# Altium PCB PCB1.PcbDoc (part 5 of 10)
Units mm, origin at the board's own origin, x right, y up, seen from the top; angles counter-clockwise.
Board outline 171.83 x 244.04 mm, 2 copper layers (Top Layer, Bottom Layer); 100 components, 186 nets, 878 pads, 221 vias.
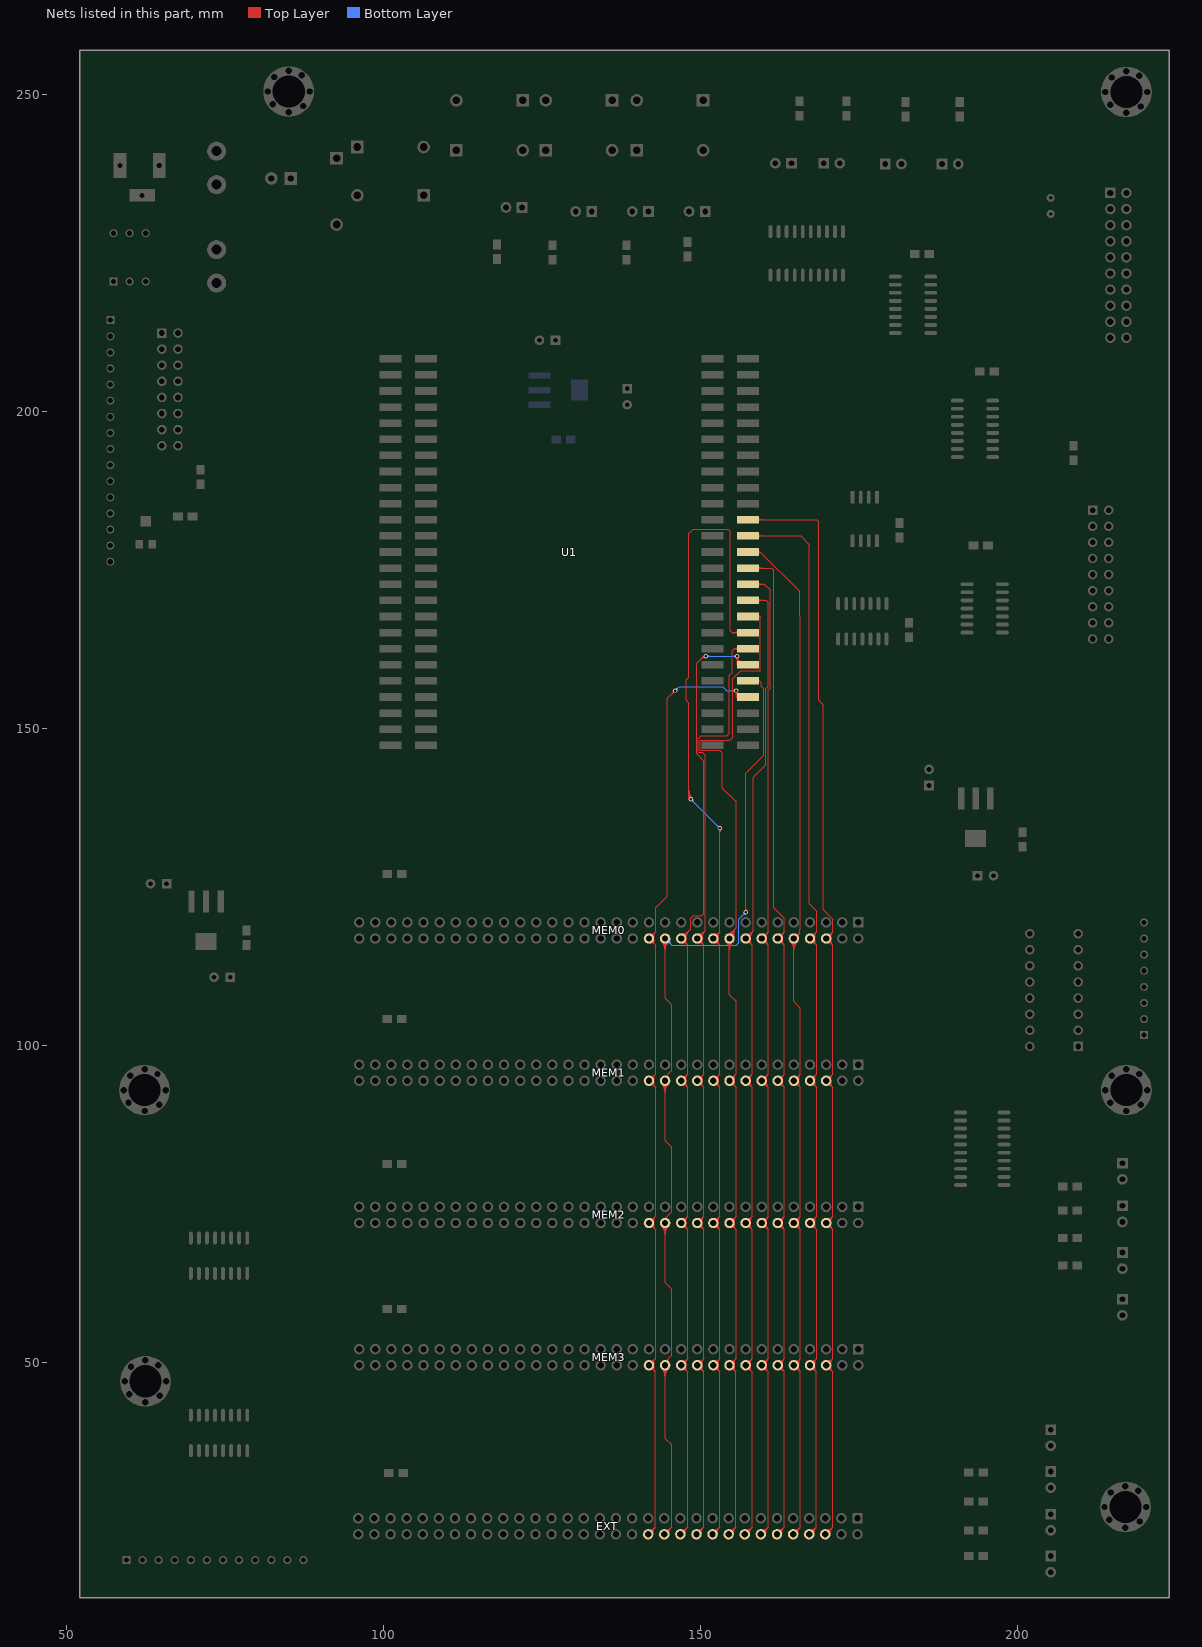
[diagram p5: the nets of this part, all layers, seen from the top]

## Via types
v1: diameter 0.7, hole 0.4, Top Layer to Bottom Layer, 221 vias

## Nets (pads, with @x,y where several pads share a name; then routed paths per layer and width w, separated by ;. In a path a pad name is that pad's centre, name@x,y a point inside that pad or via, vN(x,y) a via of type N, cw(c..) or ccw(c..) an arc to the next point about the centre after c; other vN are vias at no path point) (continued)
D02: EXT.6 MEM0.6 MEM1.6 MEM2.6 MEM3.6 U1.22 | length 223.3
  Top Layer w0.152: U1.22@157.48,182.88 168.313,182.88 168.631,182.562 168.631,154.407 169.316,153.721 169.316,121.387 170.84,119.863 170.84,117.881 ; U1.22@158.893,182.617 cw(c159.527,181.983) 159.527,182.88 cw(c159.527,183.777) U1.22@158.893,183.143 ; U1.22@159,182.51 cw(c159.895,181.615) 159.895,182.88 cw(c159.895,184.145) U1.22@159,183.25 ; EXT.6@169.672,22.86 170.815,24.003 ; EXT.6@169.708,23.302 ccw(c169.775,24.112) 170.35,23.538 ccw(c170.924,22.963) EXT.6@170.114,22.896 ; EXT.6@169.721,23.454 ccw(c169.811,24.542) 170.582,23.77 ccw(c171.354,22.999) EXT.6@170.266,22.909 ; EXT.6@169.734,23.606 ccw(c169.846,24.972) 170.815,24.003 ; MEM3.6@169.868,49.969 ccw(c169.966,50.598) 170.416,50.147 ccw(c170.867,49.697) MEM3.6@170.238,49.599 ; MEM2.6@169.868,71.528 cw(c169.966,70.899) 170.416,71.349 cw(c170.867,71.799) MEM2.6@170.238,71.898 ; MEM2.6@169.868,72.405 ccw(c169.966,73.034) 170.416,72.584 ccw(c170.867,72.134) MEM2.6@170.238,72.035 ; MEM1.6@169.868,93.965 cw(c169.966,93.336) 170.416,93.786 cw(c170.867,94.236) MEM1.6@170.238,94.335 ; MEM1.6@169.868,94.842 ccw(c169.966,95.471) 170.416,95.021 ccw(c170.867,94.571) MEM1.6@170.238,94.472 ; MEM0.6@169.868,116.401 cw(c169.966,115.772) 170.416,116.223 cw(c170.867,116.673) MEM0.6@170.238,116.771 ; MEM0.6@169.868,117.279 ccw(c169.966,117.908) 170.416,117.457 ccw(c170.867,117.007) MEM0.6@170.238,116.909 ; MEM3.6@169.877,49.093 cw(c169.98,48.507) 170.401,48.928 cw(c170.822,49.349) MEM3.6@170.236,49.452 ; MEM3.6@169.891,50.119 ccw(c170.024,50.964) 170.628,50.359 ccw(c171.233,49.755) MEM3.6@170.388,49.622 ; MEM2.6@169.891,71.377 cw(c170.024,70.533) 170.628,71.137 cw(c171.233,71.742) MEM2.6@170.388,71.874 ; MEM2.6@169.891,72.556 ccw(c170.024,73.401) 170.628,72.796 ccw(c171.233,72.191) MEM2.6@170.388,72.059 ; MEM1.6@169.891,93.814 cw(c170.024,92.969) 170.628,93.574 cw(c171.233,94.179) MEM1.6@170.388,94.311 ; MEM1.6@169.891,94.993 ccw(c170.024,95.837) 170.628,95.233 ccw(c171.233,94.628) MEM1.6@170.388,94.496 ; MEM0.6@169.891,116.251 cw(c170.024,115.406) 170.628,116.011 cw(c171.233,116.615) MEM0.6@170.388,116.748 ; MEM0.6@169.891,117.429 ccw(c170.024,118.274) 170.628,117.669 ccw(c171.233,117.065) MEM0.6@170.388,116.932 ; MEM3.6@169.903,48.943 cw(c170.043,48.155) 170.608,48.721 cw(c171.174,49.286) MEM3.6@170.386,49.426 ; MEM3.6@169.915,50.27 ccw(c170.081,51.331) 170.84,50.571 ; MEM2.6@169.915,71.227 cw(c170.081,70.166) 170.84,70.925 ; MEM2.6@169.915,72.706 ccw(c170.081,73.767) 170.84,73.008 ; MEM1.6@169.915,93.664 cw(c170.081,92.603) 170.84,93.362 ; MEM1.6@169.915,95.143 ccw(c170.081,96.204) 170.84,95.445 ; MEM0.6@169.915,116.1 cw(c170.081,115.039) 170.84,115.799 ; MEM0.6@169.915,117.58 ccw(c170.081,118.641) 170.84,117.881 ; MEM3.6@169.93,48.793 cw(c170.105,47.804) 170.815,48.514 ; EXT.6@170.418,22.922 cw(c171.784,23.034) 170.815,24.003 ; MEM3.6@170.536,49.399 ccw(c171.525,49.224) 170.815,48.514 ; MEM3.6@170.539,49.646 cw(c171.6,49.812) 170.84,50.571 ; MEM2.6@170.539,71.851 ccw(c171.6,71.685) 170.84,70.925 ; MEM2.6@170.539,72.083 cw(c171.6,72.249) 170.84,73.008 ; MEM1.6@170.539,94.287 ccw(c171.6,94.121) 170.84,93.362 ; MEM1.6@170.539,94.519 cw(c171.6,94.685) 170.84,95.445 ; MEM0.6@170.539,116.724 ccw(c171.6,116.558) 170.84,115.799 ; MEM0.6@170.539,116.956 cw(c171.6,117.122) 170.84,117.881 ; 170.815,24.003 170.815,48.514 ; 170.815,48.514 MEM3.6@169.799,49.53 170.84,50.571 ; 170.84,50.571 170.84,70.925 ; 170.84,70.925 MEM2.6@169.799,71.967 170.84,73.008 ; 170.84,73.008 170.84,93.362 ; 170.84,93.362 MEM1.6@169.799,94.403 170.84,95.445 ; 170.84,95.445 170.84,115.799 ; 170.84,115.799 MEM0.6@169.799,116.84 170.84,117.881
D03: EXT.8 MEM0.8 MEM1.8 MEM2.8 MEM3.8 U1.24 | length 218.2
  Top Layer w0.152: U1.24@157.48,180.34 165.803,180.34 167.157,178.985 167.157,122.301 168.3,121.158 168.3,117.881 ; U1.24@158.893,180.077 cw(c159.527,179.443) 159.527,180.34 cw(c159.527,181.237) U1.24@158.893,180.603 ; U1.24@159,179.97 cw(c159.895,179.075) 159.895,180.34 cw(c159.895,181.605) U1.24@159,180.71 ; EXT.8@167.132,22.86 168.275,24.003 ; EXT.8@167.168,23.302 ccw(c167.235,24.112) 167.81,23.538 ccw(c168.384,22.963) EXT.8@167.574,22.896 ; EXT.8@167.181,23.454 ccw(c167.271,24.542) 168.042,23.77 ccw(c168.814,22.999) EXT.8@167.726,22.909 ; EXT.8@167.194,23.606 ccw(c167.306,24.972) 168.275,24.003 ; MEM3.8@167.328,49.969 ccw(c167.426,50.598) 167.876,50.147 ccw(c168.327,49.697) MEM3.8@167.698,49.599 ; MEM2.8@167.328,71.528 cw(c167.426,70.899) 167.876,71.349 cw(c168.327,71.799) MEM2.8@167.698,71.898 ; MEM2.8@167.328,72.405 ccw(c167.426,73.034) 167.876,72.584 ccw(c168.327,72.134) MEM2.8@167.698,72.035 ; MEM1.8@167.328,93.965 cw(c167.426,93.336) 167.876,93.786 cw(c168.327,94.236) MEM1.8@167.698,94.335 ; MEM1.8@167.328,94.842 ccw(c167.426,95.471) 167.876,95.021 ccw(c168.327,94.571) MEM1.8@167.698,94.472 ; MEM0.8@167.328,116.401 cw(c167.426,115.772) 167.876,116.223 cw(c168.327,116.673) MEM0.8@167.698,116.771 ; MEM0.8@167.328,117.279 ccw(c167.426,117.908) 167.876,117.457 ccw(c168.327,117.007) MEM0.8@167.698,116.909 ; MEM3.8@167.337,49.093 cw(c167.44,48.507) 167.861,48.928 cw(c168.282,49.349) MEM3.8@167.696,49.452 ; MEM3.8@167.351,50.119 ccw(c167.484,50.964) 168.088,50.359 ccw(c168.693,49.755) MEM3.8@167.848,49.622 ; MEM2.8@167.351,71.377 cw(c167.484,70.533) 168.088,71.137 cw(c168.693,71.742) MEM2.8@167.848,71.874 ; MEM2.8@167.351,72.556 ccw(c167.484,73.401) 168.088,72.796 ccw(c168.693,72.191) MEM2.8@167.848,72.059 ; MEM1.8@167.351,93.814 cw(c167.484,92.969) 168.088,93.574 cw(c168.693,94.179) MEM1.8@167.848,94.311 ; MEM1.8@167.351,94.993 ccw(c167.484,95.837) 168.088,95.233 ccw(c168.693,94.628) MEM1.8@167.848,94.496 ; MEM0.8@167.351,116.251 cw(c167.484,115.406) 168.088,116.011 cw(c168.693,116.615) MEM0.8@167.848,116.748 ; MEM0.8@167.351,117.429 ccw(c167.484,118.274) 168.088,117.669 ccw(c168.693,117.065) MEM0.8@167.848,116.932 ; MEM3.8@167.363,48.943 cw(c167.503,48.155) 168.068,48.721 cw(c168.634,49.286) MEM3.8@167.846,49.426 ; MEM3.8@167.375,50.27 ccw(c167.541,51.331) 168.3,50.571 ; MEM2.8@167.375,71.227 cw(c167.541,70.166) 168.3,70.925 ; MEM2.8@167.375,72.706 ccw(c167.541,73.767) 168.3,73.008 ; MEM1.8@167.375,93.664 cw(c167.541,92.603) 168.3,93.362 ; MEM1.8@167.375,95.143 ccw(c167.541,96.204) 168.3,95.445 ; MEM0.8@167.375,116.1 cw(c167.541,115.039) 168.3,115.799 ; MEM0.8@167.375,117.58 ccw(c167.541,118.641) 168.3,117.881 ; MEM3.8@167.39,48.793 cw(c167.565,47.804) 168.275,48.514 ; EXT.8@167.878,22.922 cw(c169.244,23.034) 168.275,24.003 ; MEM3.8@167.996,49.399 ccw(c168.985,49.224) 168.275,48.514 ; MEM3.8@167.999,49.646 cw(c169.06,49.812) 168.3,50.571 ; MEM2.8@167.999,71.851 ccw(c169.06,71.685) 168.3,70.925 ; MEM2.8@167.999,72.083 cw(c169.06,72.249) 168.3,73.008 ; MEM1.8@167.999,94.287 ccw(c169.06,94.121) 168.3,93.362 ; MEM1.8@167.999,94.519 cw(c169.06,94.685) 168.3,95.445 ; MEM0.8@167.999,116.724 ccw(c169.06,116.558) 168.3,115.799 ; MEM0.8@167.999,116.956 cw(c169.06,117.122) 168.3,117.881 ; 168.275,24.003 168.275,48.514 ; 168.275,48.514 MEM3.8@167.259,49.53 168.3,50.571 ; 168.3,50.571 168.3,70.925 ; 168.3,70.925 MEM2.8@167.259,71.967 168.3,73.008 ; 168.3,73.008 168.3,93.362 ; 168.3,93.362 MEM1.8@167.259,94.403 168.3,95.445 ; 168.3,95.445 168.3,115.799 ; 168.3,115.799 MEM0.8@167.259,116.84 168.3,117.881
D04: EXT.10 MEM0.10 MEM1.10 MEM2.10 MEM3.10 U1.26 | length 208.4
  Top Layer w0.152: U1.26@157.48,177.8 159.436,177.8 ; U1.26@159.109,177.587 cw(c159.436,177.442) 159.436,177.8 ; U1.26@159.109,178.013 ccw(c159.436,178.158) 159.436,177.8 ; MEM0.10@164.19,116.311 cw(c162.911,115.032) 164.719,115.032 cw(c166.527,115.032) MEM0.10@165.248,116.311 ; MEM0.10@164.297,116.418 cw(c163.279,115.4) 164.719,115.4 cw(c166.159,115.4) MEM0.10@165.141,116.418 ; MEM0.10@164.405,116.526 cw(c163.647,115.768) 164.719,115.768 cw(c165.791,115.768) MEM0.10@165.033,116.526 ; EXT.10@164.592,22.86 165.735,24.003 ; EXT.10@164.628,23.302 ccw(c164.695,24.112) 165.27,23.538 ccw(c165.844,22.963) EXT.10@165.034,22.896 ; EXT.10@164.641,23.454 ccw(c164.731,24.542) 165.502,23.77 ccw(c166.274,22.999) EXT.10@165.186,22.909 ; EXT.10@164.654,23.606 ccw(c164.766,24.972) 165.735,24.003 ; MEM3.10@164.788,49.969 ccw(c164.886,50.598) 165.336,50.147 ccw(c165.787,49.697) MEM3.10@165.158,49.599 ; MEM2.10@164.788,71.528 cw(c164.886,70.899) 165.336,71.349 cw(c165.787,71.799) MEM2.10@165.158,71.898 ; MEM2.10@164.788,72.405 ccw(c164.886,73.034) 165.336,72.584 ccw(c165.787,72.134) MEM2.10@165.158,72.035 ; MEM1.10@164.788,93.965 cw(c164.886,93.336) 165.336,93.786 cw(c165.787,94.236) MEM1.10@165.158,94.335 ; MEM1.10@164.788,94.842 ccw(c164.886,95.471) 165.336,95.021 ccw(c165.787,94.571) MEM1.10@165.158,94.472 ; MEM3.10@164.797,49.093 cw(c164.9,48.507) 165.321,48.928 cw(c165.742,49.349) MEM3.10@165.156,49.452 ; MEM3.10@164.811,50.119 ccw(c164.944,50.964) 165.548,50.359 ccw(c166.153,49.755) MEM3.10@165.308,49.622 ; MEM2.10@164.811,71.377 cw(c164.944,70.533) 165.548,71.137 cw(c166.153,71.742) MEM2.10@165.308,71.874 ; MEM2.10@164.811,72.556 ccw(c164.944,73.401) 165.548,72.796 ccw(c166.153,72.191) MEM2.10@165.308,72.059 ; MEM1.10@164.811,93.814 cw(c164.944,92.969) 165.548,93.574 cw(c166.153,94.179) MEM1.10@165.308,94.311 ; MEM1.10@164.811,94.993 ccw(c164.944,95.837) 165.548,95.233 ccw(c166.153,94.628) MEM1.10@165.308,94.496 ; MEM3.10@164.823,48.943 cw(c164.963,48.155) 165.528,48.721 cw(c166.094,49.286) MEM3.10@165.306,49.426 ; MEM3.10@164.835,50.27 ccw(c165.001,51.331) 165.76,50.571 ; MEM2.10@164.835,71.227 cw(c165.001,70.166) 165.76,70.925 ; MEM2.10@164.835,72.706 ccw(c165.001,73.767) 165.76,73.008 ; MEM1.10@164.835,93.664 cw(c165.001,92.603) 165.76,93.362 ; MEM1.10@164.835,95.143 ccw(c165.001,96.204) 165.76,95.445 ; MEM3.10@164.85,48.793 cw(c165.025,47.804) 165.735,48.514 ; MEM0.10@164.861,117.419 ccw(c165.014,118.042) 165.467,117.588 ccw(c165.921,117.135) MEM0.10@165.298,116.982 ; MEM0.10@164.898,117.567 ccw(c165.09,118.349) 165.659,117.78 ; EXT.10@165.338,22.922 cw(c166.704,23.034) 165.735,24.003 ; MEM0.10@165.446,117.019 cw(c166.228,117.211) 165.659,117.78 ; MEM3.10@165.456,49.399 ccw(c166.445,49.224) 165.735,48.514 ; MEM3.10@165.459,49.646 cw(c166.52,49.812) 165.76,50.571 ; MEM2.10@165.459,71.851 ccw(c166.52,71.685) 165.76,70.925 ; MEM2.10@165.459,72.083 cw(c166.52,72.249) 165.76,73.008 ; MEM1.10@165.459,94.287 ccw(c166.52,94.121) 165.76,93.362 ; MEM1.10@165.459,94.519 cw(c166.52,94.685) 165.76,95.445 ; 159.436,177.8 165.639,171.597 165.639,167.742 165.76,167.62 165.76,118.339 165.659,118.237 165.659,117.78 ; 165.659,117.78 MEM0.10@164.719,116.84 164.719,106.909 165.76,105.867 165.76,95.445 ; 165.735,24.003 165.735,48.514 ; 165.735,48.514 MEM3.10@164.719,49.53 165.76,50.571 ; 165.76,50.571 165.76,70.925 ; 165.76,70.925 MEM2.10@164.719,71.967 165.76,73.008 ; 165.76,73.008 165.76,93.362 ; 165.76,93.362 MEM1.10@164.719,94.403 165.76,95.445
D05: EXT.12 MEM0.12 MEM1.12 MEM2.12 MEM3.12 U1.28 | length 208.4
  Top Layer w0.152: U1.28@157.48,175.26 161.252,175.26 161.569,174.942 161.569,121.691 163.22,120.04 163.22,117.881 ; U1.28@158.893,174.997 cw(c159.527,174.363) 159.527,175.26 cw(c159.527,176.157) U1.28@158.893,175.523 ; U1.28@159,174.89 cw(c159.895,173.995) 159.895,175.26 cw(c159.895,176.525) U1.28@159,175.63 ; EXT.12@162.052,22.86 163.195,24.003 ; EXT.12@162.088,23.302 ccw(c162.155,24.112) 162.73,23.538 ccw(c163.304,22.963) EXT.12@162.494,22.896 ; EXT.12@162.101,23.454 ccw(c162.191,24.542) 162.962,23.77 ccw(c163.734,22.999) EXT.12@162.646,22.909 ; EXT.12@162.114,23.606 ccw(c162.226,24.972) 163.195,24.003 ; MEM3.12@162.248,49.969 ccw(c162.346,50.598) 162.796,50.147 ccw(c163.247,49.697) MEM3.12@162.618,49.599 ; MEM2.12@162.248,71.528 cw(c162.346,70.899) 162.796,71.349 cw(c163.247,71.799) MEM2.12@162.618,71.898 ; MEM2.12@162.248,72.405 ccw(c162.346,73.034) 162.796,72.584 ccw(c163.247,72.134) MEM2.12@162.618,72.035 ; MEM1.12@162.248,93.965 cw(c162.346,93.336) 162.796,93.786 cw(c163.247,94.236) MEM1.12@162.618,94.335 ; MEM1.12@162.248,94.842 ccw(c162.346,95.471) 162.796,95.021 ccw(c163.247,94.571) MEM1.12@162.618,94.472 ; MEM0.12@162.248,116.401 cw(c162.346,115.772) 162.796,116.223 cw(c163.247,116.673) MEM0.12@162.618,116.771 ; MEM0.12@162.248,117.279 ccw(c162.346,117.908) 162.796,117.457 ccw(c163.247,117.007) MEM0.12@162.618,116.909 ; MEM3.12@162.257,49.093 cw(c162.36,48.507) 162.781,48.928 cw(c163.202,49.349) MEM3.12@162.616,49.452 ; MEM3.12@162.271,50.119 ccw(c162.404,50.964) 163.008,50.359 ccw(c163.613,49.755) MEM3.12@162.768,49.622 ; MEM2.12@162.271,71.377 cw(c162.404,70.533) 163.008,71.137 cw(c163.613,71.742) MEM2.12@162.768,71.874 ; MEM2.12@162.271,72.556 ccw(c162.404,73.401) 163.008,72.796 ccw(c163.613,72.191) MEM2.12@162.768,72.059 ; MEM1.12@162.271,93.814 cw(c162.404,92.969) 163.008,93.574 cw(c163.613,94.179) MEM1.12@162.768,94.311 ; MEM1.12@162.271,94.993 ccw(c162.404,95.837) 163.008,95.233 ccw(c163.613,94.628) MEM1.12@162.768,94.496 ; MEM0.12@162.271,116.251 cw(c162.404,115.406) 163.008,116.011 cw(c163.613,116.615) MEM0.12@162.768,116.748 ; MEM0.12@162.271,117.429 ccw(c162.404,118.274) 163.008,117.669 ccw(c163.613,117.065) MEM0.12@162.768,116.932 ; MEM3.12@162.283,48.943 cw(c162.423,48.155) 162.988,48.721 cw(c163.554,49.286) MEM3.12@162.766,49.426 ; MEM3.12@162.295,50.27 ccw(c162.461,51.331) 163.22,50.571 ; MEM2.12@162.295,71.227 cw(c162.461,70.166) 163.22,70.925 ; MEM2.12@162.295,72.706 ccw(c162.461,73.767) 163.22,73.008 ; MEM1.12@162.295,93.664 cw(c162.461,92.603) 163.22,93.362 ; MEM1.12@162.295,95.143 ccw(c162.461,96.204) 163.22,95.445 ; MEM0.12@162.295,116.1 cw(c162.461,115.039) 163.22,115.799 ; MEM0.12@162.295,117.58 ccw(c162.461,118.641) 163.22,117.881 ; MEM3.12@162.31,48.793 cw(c162.485,47.804) 163.195,48.514 ; EXT.12@162.798,22.922 cw(c164.164,23.034) 163.195,24.003 ; MEM3.12@162.916,49.399 ccw(c163.905,49.224) 163.195,48.514 ; MEM3.12@162.919,49.646 cw(c163.98,49.812) 163.22,50.571 ; MEM2.12@162.919,71.851 ccw(c163.98,71.685) 163.22,70.925 ; MEM2.12@162.919,72.083 cw(c163.98,72.249) 163.22,73.008 ; MEM1.12@162.919,94.287 ccw(c163.98,94.121) 163.22,93.362 ; MEM1.12@162.919,94.519 cw(c163.98,94.685) 163.22,95.445 ; MEM0.12@162.919,116.724 ccw(c163.98,116.558) 163.22,115.799 ; MEM0.12@162.919,116.956 cw(c163.98,117.122) 163.22,117.881 ; 163.195,24.003 163.195,48.514 ; 163.195,48.514 MEM3.12@162.179,49.53 163.22,50.571 ; 163.22,50.571 163.22,70.925 ; 163.22,70.925 MEM2.12@162.179,71.967 163.22,73.008 ; 163.22,73.008 163.22,93.362 ; 163.22,93.362 MEM1.12@162.179,94.403 163.22,95.445 ; 163.22,95.445 163.22,115.799 ; 163.22,115.799 MEM0.12@162.179,116.84 163.22,117.881
D06: EXT.14 MEM0.14 MEM1.14 MEM2.14 MEM3.14 U1.30 | length 204.3
  Top Layer w0.152: U1.30@157.48,172.72 160.071,172.72 160.956,171.835 160.956,156.344 160.68,156.069 160.68,117.881 ; U1.30@158.893,172.457 cw(c159.527,171.823) 159.527,172.72 cw(c159.527,173.617) U1.30@158.893,172.983 ; U1.30@159,172.35 cw(c159.895,171.455) 159.895,172.72 cw(c159.895,173.985) U1.30@159,173.09 ; EXT.14@159.512,22.86 160.655,24.003 ; EXT.14@159.548,23.302 ccw(c159.615,24.112) 160.19,23.538 ccw(c160.764,22.963) EXT.14@159.954,22.896 ; EXT.14@159.561,23.454 ccw(c159.651,24.542) 160.422,23.77 ccw(c161.194,22.999) EXT.14@160.106,22.909 ; EXT.14@159.574,23.606 ccw(c159.686,24.972) 160.655,24.003 ; MEM3.14@159.708,49.969 ccw(c159.806,50.598) 160.256,50.147 ccw(c160.707,49.697) MEM3.14@160.078,49.599 ; MEM2.14@159.708,71.528 cw(c159.806,70.899) 160.256,71.349 cw(c160.707,71.799) MEM2.14@160.078,71.898 ; MEM2.14@159.708,72.405 ccw(c159.806,73.034) 160.256,72.584 ccw(c160.707,72.134) MEM2.14@160.078,72.035 ; MEM1.14@159.708,93.965 cw(c159.806,93.336) 160.256,93.786 cw(c160.707,94.236) MEM1.14@160.078,94.335 ; MEM1.14@159.708,94.842 ccw(c159.806,95.471) 160.256,95.021 ccw(c160.707,94.571) MEM1.14@160.078,94.472 ; MEM0.14@159.708,116.401 cw(c159.806,115.772) 160.256,116.223 cw(c160.707,116.673) MEM0.14@160.078,116.771 ; MEM0.14@159.708,117.279 ccw(c159.806,117.908) 160.256,117.457 ccw(c160.707,117.007) MEM0.14@160.078,116.909 ; MEM3.14@159.717,49.093 cw(c159.82,48.507) 160.241,48.928 cw(c160.662,49.349) MEM3.14@160.076,49.452 ; MEM3.14@159.731,50.119 ccw(c159.864,50.964) 160.468,50.359 ccw(c161.073,49.755) MEM3.14@160.228,49.622 ; MEM2.14@159.731,71.377 cw(c159.864,70.533) 160.468,71.137 cw(c161.073,71.742) MEM2.14@160.228,71.874 ; MEM2.14@159.731,72.556 ccw(c159.864,73.401) 160.468,72.796 ccw(c161.073,72.191) MEM2.14@160.228,72.059 ; MEM1.14@159.731,93.814 cw(c159.864,92.969) 160.468,93.574 cw(c161.073,94.179) MEM1.14@160.228,94.311 ; MEM1.14@159.731,94.993 ccw(c159.864,95.837) 160.468,95.233 ccw(c161.073,94.628) MEM1.14@160.228,94.496 ; MEM0.14@159.731,116.251 cw(c159.864,115.406) 160.468,116.011 cw(c161.073,116.615) MEM0.14@160.228,116.748 ; MEM0.14@159.731,117.429 ccw(c159.864,118.274) 160.468,117.669 ccw(c161.073,117.065) MEM0.14@160.228,116.932 ; MEM3.14@159.743,48.943 cw(c159.883,48.155) 160.448,48.721 cw(c161.014,49.286) MEM3.14@160.226,49.426 ; MEM3.14@159.755,50.27 ccw(c159.921,51.331) 160.68,50.571 ; MEM2.14@159.755,71.227 cw(c159.921,70.166) 160.68,70.925 ; MEM2.14@159.755,72.706 ccw(c159.921,73.767) 160.68,73.008 ; MEM1.14@159.755,93.664 cw(c159.921,92.603) 160.68,93.362 ; MEM1.14@159.755,95.143 ccw(c159.921,96.204) 160.68,95.445 ; MEM0.14@159.755,116.1 cw(c159.921,115.039) 160.68,115.799 ; MEM0.14@159.755,117.58 ccw(c159.921,118.641) 160.68,117.881 ; MEM3.14@159.77,48.793 cw(c159.945,47.804) 160.655,48.514 ; EXT.14@160.258,22.922 cw(c161.624,23.034) 160.655,24.003 ; MEM3.14@160.376,49.399 ccw(c161.365,49.224) 160.655,48.514 ; MEM3.14@160.379,49.646 cw(c161.44,49.812) 160.68,50.571 ; MEM2.14@160.379,71.851 ccw(c161.44,71.685) 160.68,70.925 ; MEM2.14@160.379,72.083 cw(c161.44,72.249) 160.68,73.008 ; MEM1.14@160.379,94.287 ccw(c161.44,94.121) 160.68,93.362 ; MEM1.14@160.379,94.519 cw(c161.44,94.685) 160.68,95.445 ; MEM0.14@160.379,116.724 ccw(c161.44,116.558) 160.68,115.799 ; MEM0.14@160.379,116.956 cw(c161.44,117.122) 160.68,117.881 ; 160.655,24.003 160.655,48.514 ; 160.655,48.514 MEM3.14@159.639,49.53 160.68,50.571 ; 160.68,50.571 160.68,70.925 ; 160.68,70.925 MEM2.14@159.639,71.967 160.68,73.008 ; 160.68,73.008 160.68,93.362 ; 160.68,93.362 MEM1.14@159.639,94.403 160.68,95.445 ; 160.68,95.445 160.68,115.799 ; 160.68,115.799 MEM0.14@159.639,116.84 160.68,117.881
D07: EXT.16 MEM0.16 MEM1.16 MEM2.16 MEM3.16 U1.32 | length 204.5
  Top Layer w0.152: EXT.16@156.972,22.86 158.115,24.003 ; EXT.16@157.008,23.302 ccw(c157.075,24.112) 157.65,23.538 ccw(c158.224,22.963) EXT.16@157.414,22.896 ; EXT.16@157.021,23.454 ccw(c157.111,24.542) 157.882,23.77 ccw(c158.654,22.999) EXT.16@157.566,22.909 ; EXT.16@157.034,23.606 ccw(c157.146,24.972) 158.115,24.003 ; MEM0.16@157.107,117.284 ccw(c157.127,118.288) 157.837,117.578 ccw(c158.547,116.868) MEM0.16@157.543,116.848 ; MEM0.16@157.11,117.436 ccw(c157.136,118.785) 158.09,117.831 ccw(c159.044,116.877) MEM0.16@157.695,116.851 ; MEM0.16@157.113,117.589 ccw(c157.146,119.282) 158.344,118.085 ; MEM3.16@157.168,49.969 ccw(c157.266,50.598) 157.716,50.147 ccw(c158.167,49.697) MEM3.16@157.538,49.599 ; MEM2.16@157.168,71.528 cw(c157.266,70.899) 157.716,71.349 cw(c158.167,71.799) MEM2.16@157.538,71.898 ; MEM2.16@157.168,72.405 ccw(c157.266,73.034) 157.716,72.584 ccw(c158.167,72.134) MEM2.16@157.538,72.035 ; MEM1.16@157.168,93.965 cw(c157.266,93.336) 157.716,93.786 cw(c158.167,94.236) MEM1.16@157.538,94.335 ; MEM1.16@157.168,94.842 ccw(c157.266,95.471) 157.716,95.021 ccw(c158.167,94.571) MEM1.16@157.538,94.472 ; MEM0.16@157.168,116.401 cw(c157.266,115.772) 157.716,116.223 cw(c158.167,116.673) MEM0.16@157.538,116.771 ; MEM3.16@157.177,49.093 cw(c157.28,48.507) 157.701,48.928 cw(c158.122,49.349) MEM3.16@157.536,49.452 ; MEM3.16@157.191,50.119 ccw(c157.324,50.964) 157.928,50.359 ccw(c158.533,49.755) MEM3.16@157.688,49.622 ; MEM2.16@157.191,71.377 cw(c157.324,70.533) 157.928,71.137 cw(c158.533,71.742) MEM2.16@157.688,71.874 ; MEM2.16@157.191,72.556 ccw(c157.324,73.401) 157.928,72.796 ccw(c158.533,72.191) MEM2.16@157.688,72.059 ; MEM1.16@157.191,93.814 cw(c157.324,92.969) 157.928,93.574 cw(c158.533,94.179) MEM1.16@157.688,94.311 ; MEM1.16@157.191,94.993 ccw(c157.324,95.837) 157.928,95.233 ccw(c158.533,94.628) MEM1.16@157.688,94.496 ; MEM0.16@157.191,116.251 cw(c157.324,115.406) 157.928,116.011 cw(c158.533,116.615) MEM0.16@157.688,116.748 ; MEM3.16@157.203,48.943 cw(c157.343,48.155) 157.908,48.721 cw(c158.474,49.286) MEM3.16@157.686,49.426 ; MEM3.16@157.215,50.27 ccw(c157.381,51.331) 158.14,50.571 ; MEM2.16@157.215,71.227 cw(c157.381,70.166) 158.14,70.925 ; MEM2.16@157.215,72.706 ccw(c157.381,73.767) 158.14,73.008 ; MEM1.16@157.215,93.664 cw(c157.381,92.603) 158.14,93.362 ; MEM1.16@157.215,95.143 ccw(c157.381,96.204) 158.14,95.445 ; MEM0.16@157.215,116.1 cw(c157.381,115.039) 158.14,115.799 ; MEM3.16@157.23,48.793 cw(c157.405,47.804) 158.115,48.514 ; U1.32@157.48,170.18 160.359,170.18 160.677,169.862 160.677,156.624 160.271,156.219 160.271,144.228 158.344,142.3 158.344,118.085 ; EXT.16@157.718,22.922 cw(c159.084,23.034) 158.115,24.003 ; MEM3.16@157.836,49.399 ccw(c158.825,49.224) 158.115,48.514 ; MEM3.16@157.839,49.646 cw(c158.9,49.812) 158.14,50.571 ; MEM2.16@157.839,71.851 ccw(c158.9,71.685) 158.14,70.925 ; MEM2.16@157.839,72.083 cw(c158.9,72.249) 158.14,73.008 ; MEM1.16@157.839,94.287 ccw(c158.9,94.121) 158.14,93.362 ; MEM1.16@157.839,94.519 cw(c158.9,94.685) 158.14,95.445 ; MEM0.16@157.839,116.724 ccw(c158.9,116.558) 158.14,115.799 ; MEM0.16@157.848,116.854 cw(c159.541,116.887) 158.344,118.085 ; U1.32@158.893,169.917 cw(c159.527,169.283) 159.527,170.18 cw(c159.527,171.077) U1.32@158.893,170.443 ; U1.32@159,169.81 cw(c159.895,168.915) 159.895,170.18 cw(c159.895,171.445) U1.32@159,170.55 ; 158.115,24.003 158.115,48.514 ; 158.115,48.514 MEM3.16@157.099,49.53 158.14,50.571 ; 158.14,50.571 158.14,70.925 ; 158.14,70.925 MEM2.16@157.099,71.967 158.14,73.008 ; 158.14,73.008 158.14,93.362 ; 158.14,93.362 MEM1.16@157.099,94.403 158.14,95.445 ; 158.14,95.445 158.14,115.799 ; 158.14,115.799 MEM0.16@157.099,116.84 158.344,118.085
D08: EXT.18 MEM0.18 MEM1.18 MEM2.18 MEM3.18 U1.34 | length 212.7
  Top Layer w0.152: MEM0.18@154.03,116.311 cw(c152.751,115.032) 154.559,115.032 cw(c156.367,115.032) MEM0.18@155.088,116.311 ; MEM0.18@154.137,116.418 cw(c153.119,115.4) 154.559,115.4 cw(c155.999,115.4) MEM0.18@154.981,116.418 ; MEM0.18@154.245,116.526 cw(c153.487,115.768) 154.559,115.768 cw(c155.631,115.768) MEM0.18@154.873,116.526 ; EXT.18@154.432,22.86 155.575,24.003 ; EXT.18@154.468,23.302 ccw(c154.535,24.112) 155.11,23.538 ccw(c155.684,22.963) EXT.18@154.874,22.896 ; EXT.18@154.481,23.454 ccw(c154.571,24.542) 155.342,23.77 ccw(c156.114,22.999) EXT.18@155.026,22.909 ; EXT.18@154.494,23.606 ccw(c154.606,24.972) 155.575,24.003 ; MEM0.18@154.547,116.836 cw(c155.296,117.092) 154.736,117.652 ; MEM0.18@154.559,117.589 ccw(c154.559,117.864) 154.753,117.669 ; MEM3.18@154.628,49.969 ccw(c154.726,50.598) 155.176,50.147 ccw(c155.627,49.697) MEM3.18@154.998,49.599 ; MEM2.18@154.628,71.528 cw(c154.726,70.899) 155.176,71.349 cw(c155.627,71.799) MEM2.18@154.998,71.898 ; MEM2.18@154.628,72.405 ccw(c154.726,73.034) 155.176,72.584 ccw(c155.627,72.134) MEM2.18@154.998,72.035 ; MEM1.18@154.628,93.965 cw(c154.726,93.336) 155.176,93.786 cw(c155.627,94.236) MEM1.18@154.998,94.335 ; MEM1.18@154.628,94.842 ccw(c154.726,95.471) 155.176,95.021 ccw(c155.627,94.571) MEM1.18@154.998,94.472 ; MEM3.18@154.637,49.093 cw(c154.74,48.507) 155.161,48.928 cw(c155.582,49.349) MEM3.18@154.996,49.452 ; MEM3.18@154.651,50.119 ccw(c154.784,50.964) 155.388,50.359 ccw(c155.993,49.755) MEM3.18@155.148,49.622 ; MEM2.18@154.651,71.377 cw(c154.784,70.533) 155.388,71.137 cw(c155.993,71.742) MEM2.18@155.148,71.874 ; MEM2.18@154.651,72.556 ccw(c154.784,73.401) 155.388,72.796 ccw(c155.993,72.191) MEM2.18@155.148,72.059 ; MEM1.18@154.651,93.814 cw(c154.784,92.969) 155.388,93.574 cw(c155.993,94.179) MEM1.18@155.148,94.311 ; MEM1.18@154.651,94.993 ccw(c154.784,95.837) 155.388,95.233 ccw(c155.993,94.628) MEM1.18@155.148,94.496 ; MEM3.18@154.663,48.943 cw(c154.803,48.155) 155.368,48.721 cw(c155.934,49.286) MEM3.18@155.146,49.426 ; MEM3.18@154.675,50.27 ccw(c154.841,51.331) 155.6,50.571 ; MEM2.18@154.675,71.227 cw(c154.841,70.166) 155.6,70.925 ; MEM2.18@154.675,72.706 ccw(c154.841,73.767) 155.6,73.008 ; MEM1.18@154.675,93.664 cw(c154.841,92.603) 155.6,93.362 ; MEM1.18@154.675,95.143 ccw(c154.841,96.204) 155.6,95.445 ; MEM3.18@154.69,48.793 cw(c154.865,47.804) 155.575,48.514 ; MEM0.18@154.691,116.885 cw(c155.554,117.18) 154.909,117.825 ; MEM0.18@154.835,116.934 cw(c155.811,117.268) 155.082,117.998 ; MEM0.18@154.979,116.984 cw(c156.069,117.356) 155.255,118.171 ; MEM0.18@155.123,117.033 cw(c156.327,117.444) 155.427,118.343 ; EXT.18@155.178,22.922 cw(c156.544,23.034) 155.575,24.003 ; MEM0.18@155.268,117.082 cw(c156.584,117.532) 155.6,118.516 ; MEM3.18@155.296,49.399 ccw(c156.285,49.224) 155.575,48.514 ; MEM3.18@155.299,49.646 cw(c156.36,49.812) 155.6,50.571 ; MEM2.18@155.299,71.851 ccw(c156.36,71.685) 155.6,70.925 ; MEM2.18@155.299,72.083 cw(c156.36,72.249) 155.6,73.008 ; MEM1.18@155.299,94.287 ccw(c156.36,94.121) 155.6,93.362 ; MEM1.18@155.299,94.519 cw(c156.36,94.685) 155.6,95.445 ; U1.34@157.48,167.64 159.41,167.64 ; U1.34@159.115,167.442 cw(c159.41,167.321) 159.41,167.64 ; U1.34@159.115,167.838 ccw(c159.41,167.959) 159.41,167.64 ; 155.575,24.003 155.575,48.514 ; 155.575,48.514 MEM3.18@154.559,49.53 155.6,50.571 ; 155.6,50.571 155.6,70.925 ; 155.6,70.925 MEM2.18@154.559,71.967 155.6,73.008 ; 155.6,73.008 155.6,93.362 ; 155.6,93.362 MEM1.18@154.559,94.403 155.6,95.445 ; 155.6,95.445 155.6,106.909 154.559,107.95 MEM0.18@154.559,116.84 154.559,117.475 155.6,118.516 ; 155.6,118.516 155.6,138.379 153.441,140.538 153.441,146.11 153.035,146.517 149.98,146.517 149.939,146.558 149.939,148.082 149.98,148.123 154.623,148.123 155.042,148.542 155.042,157.797 156.299,159.055 159.41,159.055 159.436,159.08 159.436,167.615 159.41,167.64
D09: EXT.20 MEM0.20 MEM1.20 MEM2.20 MEM3.20 U1.36 | length 243.8
  Top Layer w0.152: 148.164,139.116 ccw(c148.743,139.116) v1@148.333,138.707 ; 148.164,139.484 ccw(c149.111,139.484) v1@148.441,138.814 ; 148.164,139.852 ccw(c149.478,139.852) v1@148.549,138.922 ; 148.164,140.22 ccw(c149.846,140.22) v1@148.657,139.03 ; v1(148.463,138.836) 148.164,139.136 148.164,153.975 147.745,154.394 147.745,157.671 148.164,158.09 148.164,180.752 148.844,181.432 154.305,181.432 154.686,181.051 154.686,165.417 155.004,165.1 U1.36@157.48,165.1 ; EXT.20@151.892,22.86 153.035,24.003 ; EXT.20@151.928,23.302 ccw(c151.995,24.112) 152.57,23.538 ccw(c153.144,22.963) EXT.20@152.334,22.896 ; EXT.20@151.941,23.454 ccw(c152.031,24.542) 152.802,23.77 ccw(c153.574,22.999) EXT.20@152.486,22.909 ; EXT.20@151.954,23.606 ccw(c152.066,24.972) 153.035,24.003 ; MEM3.20@152.088,49.969 ccw(c152.186,50.598) 152.636,50.147 ccw(c153.087,49.697) MEM3.20@152.458,49.599 ; MEM2.20@152.088,71.528 cw(c152.186,70.899) 152.636,71.349 cw(c153.087,71.799) MEM2.20@152.458,71.898 ; MEM2.20@152.088,72.405 ccw(c152.186,73.034) 152.636,72.584 ccw(c153.087,72.134) MEM2.20@152.458,72.035 ; MEM1.20@152.088,93.965 cw(c152.186,93.336) 152.636,93.786 cw(c153.087,94.236) MEM1.20@152.458,94.335 ; MEM1.20@152.088,94.842 ccw(c152.186,95.471) 152.636,95.021 ccw(c153.087,94.571) MEM1.20@152.458,94.472 ; MEM0.20@152.088,116.401 cw(c152.186,115.772) 152.636,116.223 cw(c153.087,116.673) MEM0.20@152.458,116.771 ; MEM0.20@152.088,117.279 ccw(c152.186,117.908) 152.636,117.457 ccw(c153.087,117.007) MEM0.20@152.458,116.909 ; MEM3.20@152.097,49.093 cw(c152.2,48.507) 152.621,48.928 cw(c153.042,49.349) MEM3.20@152.456,49.452 ; MEM3.20@152.111,50.119 ccw(c152.244,50.964) 152.848,50.359 ccw(c153.453,49.755) MEM3.20@152.608,49.622 ; MEM2.20@152.111,71.377 cw(c152.244,70.533) 152.848,71.137 cw(c153.453,71.742) MEM2.20@152.608,71.874 ; MEM2.20@152.111,72.556 ccw(c152.244,73.401) 152.848,72.796 ccw(c153.453,72.191) MEM2.20@152.608,72.059 ; MEM1.20@152.111,93.814 cw(c152.244,92.969) 152.848,93.574 cw(c153.453,94.179) MEM1.20@152.608,94.311 ; MEM1.20@152.111,94.993 ccw(c152.244,95.837) 152.848,95.233 ccw(c153.453,94.628) MEM1.20@152.608,94.496 ; MEM0.20@152.111,116.251 cw(c152.244,115.406) 152.848,116.011 cw(c153.453,116.615) MEM0.20@152.608,116.748 ; MEM0.20@152.111,117.429 ccw(c152.244,118.274) 152.848,117.669 ccw(c153.453,117.065) MEM0.20@152.608,116.932 ; MEM3.20@152.123,48.943 cw(c152.263,48.155) 152.828,48.721 cw(c153.394,49.286) MEM3.20@152.606,49.426 ; MEM3.20@152.135,50.27 ccw(c152.301,51.331) 153.06,50.571 ; MEM2.20@152.135,71.227 cw(c152.301,70.166) 153.06,70.925 ; MEM2.20@152.135,72.706 ccw(c152.301,73.767) 153.06,73.008 ; MEM1.20@152.135,93.664 cw(c152.301,92.603) 153.06,93.362 ; MEM1.20@152.135,95.143 ccw(c152.301,96.204) 153.06,95.445 ; MEM0.20@152.135,116.1 cw(c152.301,115.039) 153.06,115.799 ; MEM0.20@152.135,117.58 ccw(c152.301,118.641) 153.06,117.881 ; MEM3.20@152.15,48.793 cw(c152.325,47.804) 153.035,48.514 ; EXT.20@152.638,22.922 cw(c154.004,23.034) 153.035,24.003 ; MEM3.20@152.756,49.399 ccw(c153.745,49.224) 153.035,48.514 ; MEM3.20@152.759,49.646 cw(c153.82,49.812) 153.06,50.571 ; MEM2.20@152.759,71.851 ccw(c153.82,71.685) 153.06,70.925 ; MEM2.20@152.759,72.083 cw(c153.82,72.249) 153.06,73.008 ; MEM1.20@152.759,94.287 ccw(c153.82,94.121) 153.06,93.362 ; MEM1.20@152.759,94.519 cw(c153.82,94.685) 153.06,95.445 ; MEM0.20@152.759,116.724 ccw(c153.82,116.558) 153.06,115.799 ; MEM0.20@152.759,116.956 cw(c153.82,117.122) 153.06,117.881 ; v1@152.867,134.045 cw(c152.399,133.578) 153.06,133.578 cw(c153.721,133.578) v1@153.254,134.045 ; v1(153.06,134.239) 153.06,117.881 ; U1.36@155.96,164.73 ccw(c155.065,163.835) 155.065,165.1 ccw(c155.065,166.365) U1.36@155.96,165.47 ; U1.36@156.067,164.837 ccw(c155.433,164.203) 155.433,165.1 ccw(c155.433,165.997) U1.36@156.067,165.363 ; 153.035,24.003 153.035,48.514 ; 153.035,48.514 MEM3.20@152.019,49.53 153.06,50.571 ; 153.06,50.571 153.06,70.925 ; 153.06,70.925 MEM2.20@152.019,71.967 153.06,73.008 ; 153.06,73.008 153.06,93.362 ; 153.06,93.362 MEM1.20@152.019,94.403 153.06,95.445 ; 153.06,95.445 153.06,115.799 ; 153.06,115.799 MEM0.20@152.019,116.84 153.06,117.881
  Bottom Layer w0.152: v1@148.463,138.563 cw(c148.463,137.902) 148.93,138.369 cw(c149.398,138.836) v1@148.737,138.836 ; v1(148.463,138.836) v1(153.06,134.239) ; v1@152.787,134.239 ccw(c152.126,134.239) 152.593,134.706 ccw(c153.06,135.174) v1@153.06,134.513
D10: EXT.22 MEM0.22 MEM1.22 MEM2.22 MEM3.22 U1.38 | length 200
  Top Layer w0.152: EXT.22@149.352,22.86 150.495,24.003 ; EXT.22@149.388,23.302 ccw(c149.455,24.112) 150.03,23.538 ccw(c150.604,22.963) EXT.22@149.794,22.896 ; EXT.22@149.401,23.454 ccw(c149.491,24.542) 150.262,23.77 ccw(c151.034,22.999) EXT.22@149.946,22.909 ; EXT.22@149.414,23.606 ccw(c149.526,24.972) 150.495,24.003 ; MEM0.22@149.479,117.284 ccw(c149.479,118.356) 150.237,117.598 ccw(c150.995,116.84) MEM0.22@149.923,116.84 ; MEM0.22@149.479,117.436 ccw(c149.479,118.876) 150.497,117.858 ccw(c151.515,116.84) MEM0.22@150.075,116.84 ; MEM0.22@149.479,117.589 ccw(c149.479,119.397) 150.757,118.118 ccw(c152.036,116.84) MEM0.22@150.228,116.84 ; MEM3.22@149.548,49.969 ccw(c149.646,50.598) 150.096,50.147 ccw(c150.547,49.697) MEM3.22@149.918,49.599 ; MEM2.22@149.548,71.528 cw(c149.646,70.899) 150.096,71.349 cw(c150.547,71.799) MEM2.22@149.918,71.898 ; MEM2.22@149.548,72.405 ccw(c149.646,73.034) 150.096,72.584 ccw(c150.547,72.134) MEM2.22@149.918,72.035 ; MEM1.22@149.548,93.965 cw(c149.646,93.336) 150.096,93.786 cw(c150.547,94.236) MEM1.22@149.918,94.335 ; MEM1.22@149.548,94.842 ccw(c149.646,95.471) 150.096,95.021 ccw(c150.547,94.571) MEM1.22@149.918,94.472 ; MEM0.22@149.548,116.401 cw(c149.646,115.772) 150.096,116.223 cw(c150.547,116.673) MEM0.22@149.918,116.771 ; MEM3.22@149.557,49.093 cw(c149.66,48.507) 150.081,48.928 cw(c150.502,49.349) MEM3.22@149.916,49.452 ; MEM3.22@149.571,50.119 ccw(c149.704,50.964) 150.308,50.359 ccw(c150.913,49.755) MEM3.22@150.068,49.622 ; MEM2.22@149.571,71.377 cw(c149.704,70.533) 150.308,71.137 cw(c150.913,71.742) MEM2.22@150.068,71.874 ; MEM2.22@149.571,72.556 ccw(c149.704,73.401) 150.308,72.796 ccw(c150.913,72.191) MEM2.22@150.068,72.059 ; MEM1.22@149.571,93.814 cw(c149.704,92.969) 150.308,93.574 cw(c150.913,94.179) MEM1.22@150.068,94.311 ; MEM1.22@149.571,94.993 ccw(c149.704,95.837) 150.308,95.233 ccw(c150.913,94.628) MEM1.22@150.068,94.496 ; MEM0.22@149.571,116.251 cw(c149.704,115.406) 150.308,116.011 cw(c150.913,116.615) MEM0.22@150.068,116.748 ; MEM3.22@149.583,48.943 cw(c149.723,48.155) 150.288,48.721 cw(c150.854,49.286) MEM3.22@150.066,49.426 ; MEM3.22@149.595,50.27 ccw(c149.761,51.331) 150.52,50.571 ; MEM2.22@149.595,71.227 cw(c149.761,70.166) 150.52,70.925 ; MEM2.22@149.595,72.706 ccw(c149.761,73.767) 150.52,73.008 ; MEM1.22@149.595,93.664 cw(c149.761,92.603) 150.52,93.362 ; MEM1.22@149.595,95.143 ccw(c149.761,96.204) 150.52,95.445 ; MEM0.22@149.595,116.1 cw(c149.761,115.039) 150.52,115.799 ; MEM3.22@149.61,48.793 cw(c149.785,47.804) 150.495,48.514 ; EXT.22@150.098,22.922 cw(c151.464,23.034) 150.495,24.003 ; MEM3.22@150.216,49.399 ccw(c151.205,49.224) 150.495,48.514 ; MEM3.22@150.219,49.646 cw(c151.28,49.812) 150.52,50.571 ; MEM2.22@150.219,71.851 ccw(c151.28,71.685) 150.52,70.925 ; MEM2.22@150.219,72.083 cw(c151.28,72.249) 150.52,73.008 ; MEM1.22@150.219,94.287 ccw(c151.28,94.121) 150.52,93.362 ; MEM1.22@150.219,94.519 cw(c151.28,94.685) 150.52,95.445 ; MEM0.22@150.219,116.724 ccw(c151.28,116.558) 150.52,115.799 ; U1.38@155.912,162.244 ccw(c155.277,161.764) 155.277,162.56 ; U1.38@155.912,162.876 cw(c155.277,163.356) 155.277,162.56 ; U1.38@156.034,162.336 ccw(c155.584,161.996) 155.584,162.56 ccw(c155.584,163.124) U1.38@156.034,162.784 ; U1.38@157.48,162.56 155.277,162.56 ; 150.495,24.003 150.495,48.514 ; 150.495,48.514 MEM3.22@149.479,49.53 150.52,50.571 ; 150.52,50.571 150.52,70.925 ; 150.52,70.925 MEM2.22@149.479,71.967 150.52,73.008 ; 150.52,73.008 150.52,93.362 ; 150.52,93.362 MEM1.22@149.479,94.403 150.52,95.445 ; 150.52,95.445 150.52,115.799 ; 150.52,115.799 MEM0.22@149.479,116.84 150.774,118.135 150.774,145.732 150.298,146.209 149.657,146.253 149.657,148.387 150.114,148.844 154.178,148.844 154.559,149.225 154.559,158.38 154.96,158.781 154.96,162.243 155.277,162.56
D11: EXT.24 MEM0.24 MEM1.24 MEM2.24 MEM3.24 U1.40 | length 211.2
  Top Layer w0.152: EXT.24@146.812,22.86 147.955,24.003 ; EXT.24@146.848,23.302 ccw(c146.915,24.112) 147.49,23.538 ccw(c148.064,22.963) EXT.24@147.254,22.896 ; EXT.24@146.861,23.454 ccw(c146.951,24.542) 147.722,23.77 ccw(c148.494,22.999) EXT.24@147.406,22.909 ; EXT.24@146.874,23.606 ccw(c146.986,24.972) 147.955,24.003 ; MEM0.24@146.939,117.284 ccw(c146.939,118.356) 147.697,117.598 ccw(c148.455,116.84) MEM0.24@147.383,116.84 ; MEM0.24@146.939,117.436 ccw(c146.939,118.876) 147.957,117.858 ccw(c148.975,116.84) MEM0.24@147.535,116.84 ; MEM0.24@146.939,117.589 ccw(c146.939,119.397) 148.217,118.118 ccw(c149.496,116.84) MEM0.24@147.688,116.84 ; MEM3.24@147.008,49.969 ccw(c147.106,50.598) 147.556,50.147 ccw(c148.007,49.697) MEM3.24@147.378,49.599 ; MEM2.24@147.008,71.528 cw(c147.106,70.899) 147.556,71.349 cw(c148.007,71.799) MEM2.24@147.378,71.898 ; MEM2.24@147.008,72.405 ccw(c147.106,73.034) 147.556,72.584 ccw(c148.007,72.134) MEM2.24@147.378,72.035 ; MEM1.24@147.008,93.965 cw(c147.106,93.336) 147.556,93.786 cw(c148.007,94.236) MEM1.24@147.378,94.335 ; MEM1.24@147.008,94.842 ccw(c147.106,95.471) 147.556,95.021 ccw(c148.007,94.571) MEM1.24@147.378,94.472 ; MEM0.24@147.008,116.401 cw(c147.106,115.772) 147.556,116.223 cw(c148.007,116.673) MEM0.24@147.378,116.771 ; MEM3.24@147.017,49.093 cw(c147.12,48.507) 147.541,48.928 cw(c147.962,49.349) MEM3.24@147.376,49.452 ; MEM3.24@147.031,50.119 ccw(c147.164,50.964) 147.768,50.359 ccw(c148.373,49.755) MEM3.24@147.528,49.622 ; MEM2.24@147.031,71.377 cw(c147.164,70.533) 147.768,71.137 cw(c148.373,71.742) MEM2.24@147.528,71.874 ; MEM2.24@147.031,72.556 ccw(c147.164,73.401) 147.768,72.796 ccw(c148.373,72.191) MEM2.24@147.528,72.059 ; MEM1.24@147.031,93.814 cw(c147.164,92.969) 147.768,93.574 cw(c148.373,94.179) MEM1.24@147.528,94.311 ; MEM1.24@147.031,94.993 ccw(c147.164,95.837) 147.768,95.233 ccw(c148.373,94.628) MEM1.24@147.528,94.496 ; MEM0.24@147.031,116.251 cw(c147.164,115.406) 147.768,116.011 cw(c148.373,116.615) MEM0.24@147.528,116.748 ; MEM3.24@147.043,48.943 cw(c147.183,48.155) 147.748,48.721 cw(c148.314,49.286) MEM3.24@147.526,49.426 ; MEM3.24@147.055,50.27 ccw(c147.221,51.331) 147.98,50.571 ; MEM2.24@147.055,71.227 cw(c147.221,70.166) 147.98,70.925 ; MEM2.24@147.055,72.706 ccw(c147.221,73.767) 147.98,73.008 ; MEM1.24@147.055,93.664 cw(c147.221,92.603) 147.98,93.362 ; MEM1.24@147.055,95.143 ccw(c147.221,96.204) 147.98,95.445 ; MEM0.24@147.055,116.1 cw(c147.221,115.039) 147.98,115.799 ; MEM3.24@147.07,48.793 cw(c147.245,47.804) 147.955,48.514 ; EXT.24@147.558,22.922 cw(c148.924,23.034) 147.955,24.003 ; MEM3.24@147.676,49.399 ccw(c148.665,49.224) 147.955,48.514 ; MEM3.24@147.679,49.646 cw(c148.74,49.812) 147.98,50.571 ; MEM2.24@147.679,71.851 ccw(c148.74,71.685) 147.98,70.925 ; MEM2.24@147.679,72.083 cw(c148.74,72.249) 147.98,73.008 ; MEM1.24@147.679,94.287 ccw(c148.74,94.121) 147.98,93.362 ; MEM1.24@147.679,94.519 cw(c148.74,94.685) 147.98,95.445 ; MEM0.24@147.679,116.724 ccw(c148.74,116.558) 147.98,115.799 ; 149.778,160.674 cw(c150.787,159.665) v1@150.787,161.092 ; 150.038,160.934 cw(c150.787,160.185) v1@150.787,161.245 ; 150.298,161.195 cw(c150.787,160.706) v1@150.787,161.397 ; v1(150.787,161.366) 150.47,161.366 149.377,160.274 149.377,145.948 150.495,144.831 150.495,120.764 150.177,120.447 148.869,120.447 148.438,120.015 148.438,118.339 MEM0.24@146.939,116.84 147.98,115.799 ; v1@155.585,161.173 cw(c155.117,160.705) 155.778,160.705 cw(c156.439,160.705) v1@155.972,161.173 ; U1.40@155.778,160.412 ccw(c156.419,160.412) U1.40@156.277,159.788 ; U1.40@155.778,160.603 ccw(c156.462,160.603) U1.40@156.311,159.936 ; 155.778,160.794 ccw(c156.505,160.794) U1.40@156.345,160.085 ; 155.778,160.985 ccw(c156.548,160.985) U1.40@156.378,160.234 ; v1@155.778,161.175 ccw(c156.591,161.175) U1.40@156.412,160.382 ; U1.40@156.446,160.531 cw(c156.635,161.366) v1(155.778,161.366) 155.778,160.02 U1.40@157.48,160.02 ; 147.955,24.003 147.955,48.514 ; 147.955,48.514 MEM3.24@146.939,49.53 147.98,50.571 ; 147.98,50.571 147.98,70.925 ; 147.98,70.925 MEM2.24@146.939,71.967 147.98,73.008 ; 147.98,73.008 147.98,93.362 ; 147.98,93.362 MEM1.24@146.939,94.403 147.98,95.445 ; 147.98,95.445 147.98,115.799
  Bottom Layer w0.152: v1(150.787,161.366) v1(155.778,161.366) ; v1@150.981,161.173 cw(c151.448,160.705) 151.448,161.366 cw(c151.448,162.027) v1@150.981,161.56 ; v1@155.585,161.173 ccw(c155.117,160.705) 155.117,161.366 ccw(c155.117,162.027) v1@155.585,161.56
D12: EXT.26 MEM0.26 MEM1.26 MEM2.26 MEM3.26 U1.42 | length 195.4
  Top Layer w0.152: MEM3.26@143.87,49.001 cw(c142.591,47.722) 144.399,47.722 cw(c146.207,47.722) MEM3.26@144.928,49.001 ; MEM2.26@143.87,71.437 cw(c142.591,70.159) 144.399,70.159 cw(c146.207,70.159) MEM2.26@144.928,71.437 ; MEM1.26@143.87,93.874 cw(c142.591,92.596) 144.399,92.596 cw(c146.207,92.596) MEM1.26@144.928,93.874 ; MEM0.26@143.87,116.311 cw(c142.591,115.032) 144.399,115.032 cw(c146.207,115.032) MEM0.26@144.928,116.311 ; MEM3.26@143.977,49.108 cw(c142.959,48.09) 144.399,48.09 cw(c145.839,48.09) MEM3.26@144.821,49.108 ; MEM2.26@143.977,71.545 cw(c142.959,70.527) 144.399,70.527 cw(c145.839,70.527) MEM2.26@144.821,71.545 ; MEM1.26@143.977,93.982 cw(c142.959,92.963) 144.399,92.963 cw(c145.839,92.963) MEM1.26@144.821,93.982 ; MEM0.26@143.977,116.418 cw(c142.959,115.4) 144.399,115.4 cw(c145.839,115.4) MEM0.26@144.821,116.418 ; MEM3.26@144.085,49.216 cw(c143.327,48.458) 144.399,48.458 cw(c145.471,48.458) MEM3.26@144.713,49.216 ; MEM2.26@144.085,71.653 cw(c143.327,70.895) 144.399,70.895 cw(c145.471,70.895) MEM2.26@144.713,71.653 ; MEM1.26@144.085,94.089 cw(c143.327,93.331) 144.399,93.331 cw(c145.471,93.331) MEM1.26@144.713,94.089 ; MEM0.26@144.085,116.526 cw(c143.327,115.768) 144.399,115.768 cw(c145.471,115.768) MEM0.26@144.713,116.526 ; EXT.26@144.272,22.86 145.415,24.003 ; EXT.26@144.308,23.302 ccw(c144.375,24.112) 144.95,23.538 ccw(c145.524,22.963) EXT.26@144.714,22.896 ; EXT.26@144.321,23.454 ccw(c144.411,24.542) 145.182,23.77 ccw(c145.954,22.999) EXT.26@144.866,22.909 ; EXT.26@144.334,23.606 ccw(c144.446,24.972) 145.415,24.003 ; MEM0.26@144.399,116.84 144.399,107.417 145.44,106.375 145.44,96.035 144.839,95.434 144.839,94.844 MEM1.26@144.399,94.403 144.399,84.963 145.44,83.922 145.44,73.762 144.399,72.72 MEM2.26@144.399,71.967 144.399,62.56 145.44,61.519 145.44,51.129 144.783,50.472 144.783,49.914 MEM3.26@144.399,49.53 144.399,37.973 145.415,36.957 145.415,24.003 ; 144.783,50.41 ccw(c145.279,50.41) MEM3.26@144.928,50.059 ; 144.839,95.148 ccw(c145.143,95.148) MEM1.26@144.928,94.933 ; EXT.26@145.018,22.922 cw(c146.384,23.034) 145.415,24.003 ; v1@156.956,121.148 ccw(c156.489,121.616) 157.15,121.616 ccw(c157.811,121.616) v1@157.343,121.148 ; v1(157.15,120.955) 157.15,142.875 159.992,145.717 159.992,156.2 159.568,156.624 159.568,157.162 159.251,157.48 ; U1.42@157.48,157.48 159.251,157.48 ; U1.42@159.146,157.392 cw(c159.251,157.374) 159.251,157.48 ; U1.42@159.146,157.568 ccw(c159.251,157.586) 159.251,157.48
  Bottom Layer w0.152: MEM0.26@144.399,116.84 145.44,115.799 ; MEM0.26@144.468,116.401 cw(c144.566,115.772) 145.016,116.223 cw(c145.467,116.673) MEM0.26@144.838,116.771 ; MEM0.26@144.491,116.251 cw(c144.624,115.406) 145.228,116.011 cw(c145.833,116.615) MEM0.26@144.988,116.748 ; MEM0.26@144.515,116.1 cw(c144.681,115.039) 145.44,115.799 ; MEM0.26@145.139,116.724 ccw(c146.2,116.558) 145.44,115.799 ; v1@156.876,120.955 cw(c156.215,120.955) 156.682,120.487 cw(c157.15,120.02) v1@157.15,120.681 ; v1(157.15,120.955) 156.058,119.863 156.058,116.205 155.651,115.799 145.44,115.799
D13: EXT.28 MEM0.28 MEM1.28 MEM2.28 MEM3.28 U1.44 | length 200
  Top Layer w0.152: EXT.28@141.732,22.86 142.875,24.003 ; EXT.28@141.768,23.302 ccw(c141.835,24.112) 142.41,23.538 ccw(c142.984,22.963) EXT.28@142.174,22.896 ; EXT.28@141.781,23.454 ccw(c141.871,24.542) 142.642,23.77 ccw(c143.414,22.999) EXT.28@142.326,22.909 ; EXT.28@141.794,23.606 ccw(c141.906,24.972) 142.875,24.003 ; MEM3.28@141.928,49.969 ccw(c142.026,50.598) 142.476,50.147 ccw(c142.927,49.697) MEM3.28@142.298,49.599 ; MEM2.28@141.928,71.528 cw(c142.026,70.899) 142.476,71.349 cw(c142.927,71.799) MEM2.28@142.298,71.898 ; MEM2.28@141.928,72.405 ccw(c142.026,73.034) 142.476,72.584 ccw(c142.927,72.134) MEM2.28@142.298,72.035 ; MEM1.28@141.928,93.965 cw(c142.026,93.336) 142.476,93.786 cw(c142.927,94.236) MEM1.28@142.298,94.335 ; MEM1.28@141.928,94.842 ccw(c142.026,95.471) 142.476,95.021 ccw(c142.927,94.571) MEM1.28@142.298,94.472 ; MEM0.28@141.928,116.401 cw(c142.026,115.772) 142.476,116.223 cw(c142.927,116.673) MEM0.28@142.298,116.771 ; MEM0.28@141.928,117.279 ccw(c142.026,117.908) 142.476,117.457 ccw(c142.927,117.007) MEM0.28@142.298,116.909 ; MEM3.28@141.937,49.093 cw(c142.04,48.507) 142.461,48.928 cw(c142.882,49.349) MEM3.28@142.296,49.452 ; MEM3.28@141.951,50.119 ccw(c142.084,50.964) 142.688,50.359 ccw(c143.293,49.755) MEM3.28@142.448,49.622 ; MEM2.28@141.951,71.377 cw(c142.084,70.533) 142.688,71.137 cw(c143.293,71.742) MEM2.28@142.448,71.874 ; MEM2.28@141.951,72.556 ccw(c142.084,73.401) 142.688,72.796 ccw(c143.293,72.191) MEM2.28@142.448,72.059 ; MEM1.28@141.951,93.814 cw(c142.084,92.969) 142.688,93.574 cw(c143.293,94.179) MEM1.28@142.448,94.311 ; MEM1.28@141.951,94.993 ccw(c142.084,95.837) 142.688,95.233 ccw(c143.293,94.628) MEM1.28@142.448,94.496 ; MEM0.28@141.951,116.251 cw(c142.084,115.406) 142.688,116.011 cw(c143.293,116.615) MEM0.28@142.448,116.748 ; MEM0.28@141.951,117.429 ccw(c142.084,118.274) 142.688,117.669 ccw(c143.293,117.065) MEM0.28@142.448,116.932 ; MEM3.28@141.963,48.943 cw(c142.103,48.155) 142.668,48.721 cw(c143.234,49.286) MEM3.28@142.446,49.426 ; MEM3.28@141.975,50.27 ccw(c142.141,51.331) 142.9,50.571 ; MEM2.28@141.975,71.227 cw(c142.141,70.166) 142.9,70.925 ; MEM2.28@141.975,72.706 ccw(c142.141,73.767) 142.9,73.008 ; MEM1.28@141.975,93.664 cw(c142.141,92.603) 142.9,93.362 ; MEM1.28@141.975,95.143 ccw(c142.141,96.204) 142.9,95.445 ; MEM0.28@141.975,116.1 cw(c142.141,115.039) 142.9,115.799 ; MEM0.28@141.975,117.58 ccw(c142.141,118.641) 142.9,117.881 ; MEM3.28@141.99,48.793 cw(c142.165,47.804) 142.875,48.514 ; EXT.28@142.478,22.922 cw(c143.844,23.034) 142.875,24.003 ; MEM3.28@142.596,49.399 ccw(c143.585,49.224) 142.875,48.514 ; MEM3.28@142.599,49.646 cw(c143.66,49.812) 142.9,50.571 ; MEM2.28@142.599,71.851 ccw(c143.66,71.685) 142.9,70.925 ; MEM2.28@142.599,72.083 cw(c143.66,72.249) 142.9,73.008 ; MEM1.28@142.599,94.287 ccw(c143.66,94.121) 142.9,93.362 ; MEM1.28@142.599,94.519 cw(c143.66,94.685) 142.9,95.445 ; MEM0.28@142.599,116.724 ccw(c143.66,116.558) 142.9,115.799 ; MEM0.28@142.599,116.956 cw(c143.66,117.122) 142.9,117.881 ; v1@145.7,155.956 cw(c145.039,155.956) 145.506,155.489 cw(c145.974,155.021) v1@145.974,155.682 ; v1(145.974,155.956) 144.78,154.762 144.78,123.546 142.9,121.666 142.9,117.881 ; v1@155.433,155.762 cw(c154.966,155.295) 155.627,155.295 cw(c156.288,155.295) v1@155.82,155.762 ; v1(155.627,155.956) 155.627,154.965 155.652,154.94 ; U1.44@155.823,154.808 ccw(c155.652,154.763) 155.652,154.94 ; U1.44@155.823,155.072 cw(c155.652,155.117) 155.652,154.94 ; U1.44@157.48,154.94 155.652,154.94 ; 142.875,24.003 142.875,48.514 ; 142.875,48.514 MEM3.28@141.859,49.53 142.9,50.571 ; 142.9,50.571 142.9,70.925 ; 142.9,70.925 MEM2.28@141.859,71.967 142.9,73.008 ; 142.9,73.008 142.9,93.362 ; 142.9,93.362 MEM1.28@141.859,94.403 142.9,95.445 ; 142.9,95.445 142.9,115.799 ; 142.9,115.799 MEM0.28@141.859,116.84 142.9,117.881
  Bottom Layer w0.152: v1(145.974,155.956) 146.603,156.585 153.502,156.585 154.132,155.956 v1(155.627,155.956) ; v1@145.974,156.23 ccw(c145.974,156.891) 146.441,156.423 ccw(c146.909,155.956) v1@146.248,155.956 ; v1@155.433,155.762 ccw(c154.966,155.295) 154.966,155.956 ccw(c154.966,156.617) v1@155.433,156.15